# Altium PCB Agilent_3Ghz_option.PcbDoc
Units mm, origin at the board's own origin, x right, y up, seen from the top; angles counter-clockwise.
Board outline 100 x 42.01 mm, 2 copper layers (Top Layer, Bottom Layer), stack 1.671 mm thick; 60 components, 26 nets, 599 pads, 517 vias.
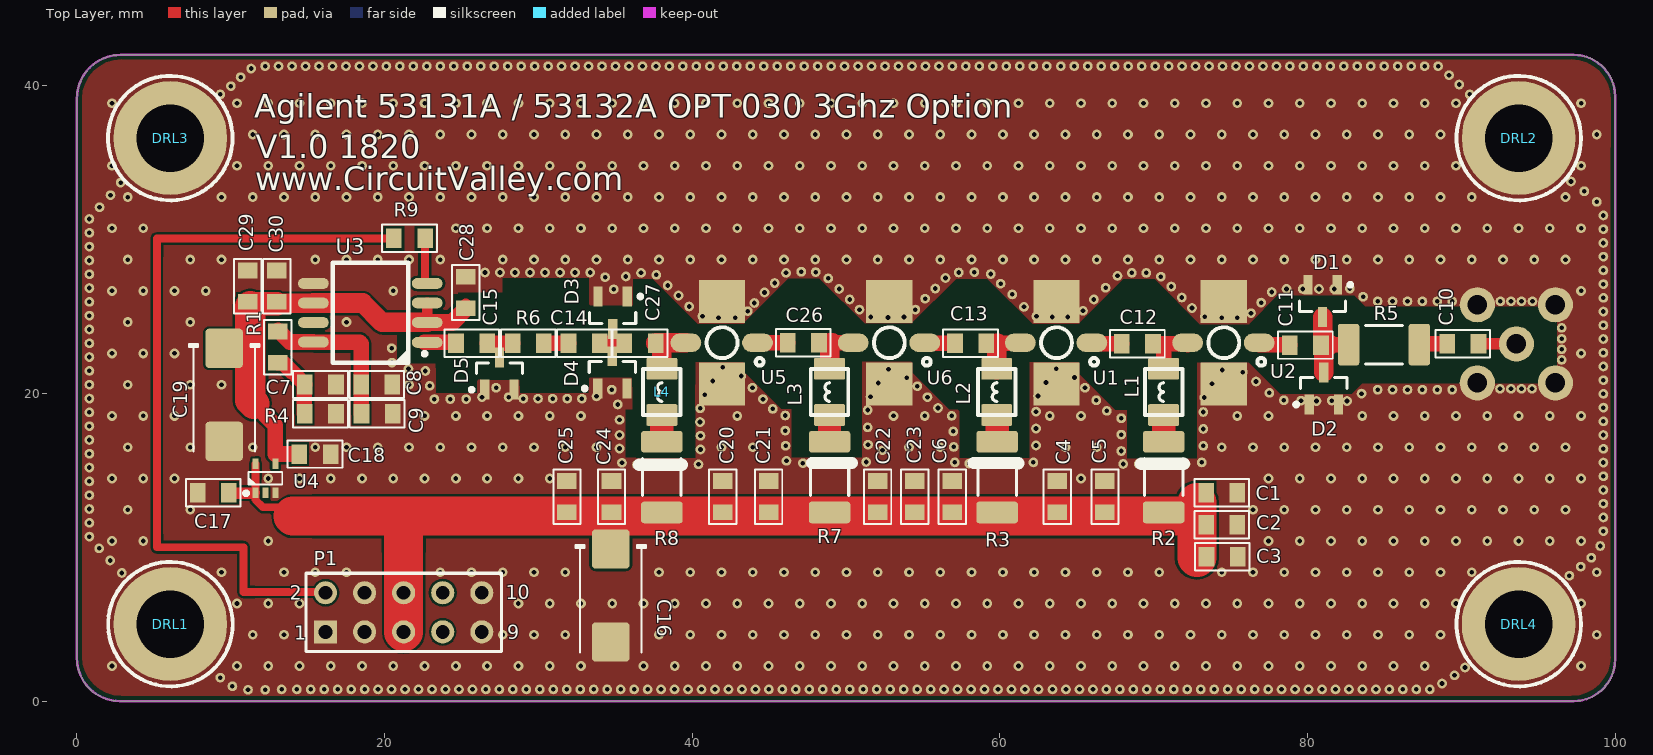
[diagram p0: Top Layer view]
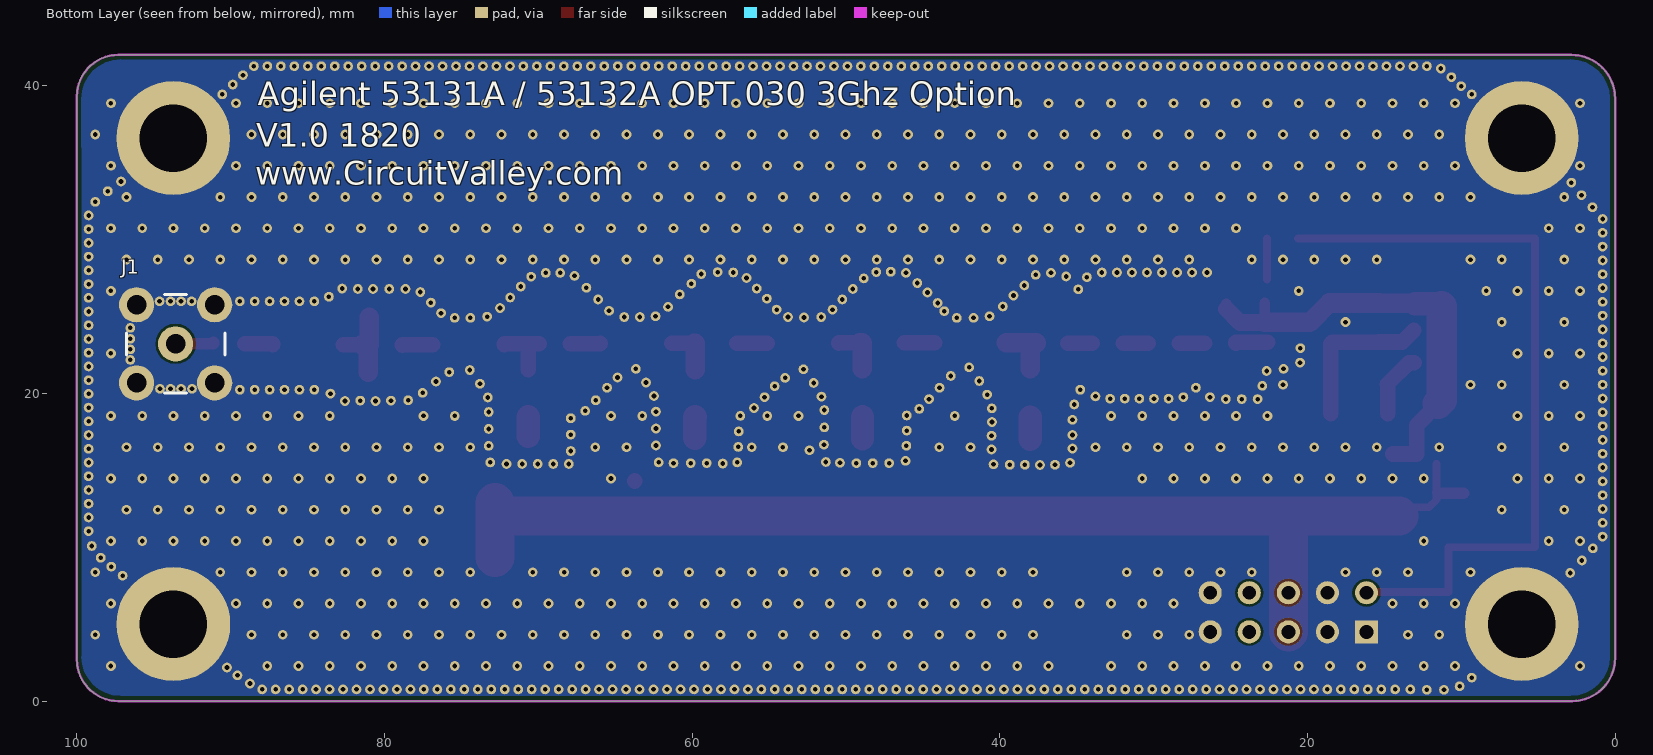
[diagram p1: Bottom Layer view, seen from below]

## Layer stack, top to bottom
Top Solder: solder mask 0.0102, Solder Resist, Dk 3.5
Top Layer: signal copper 0.0356
Dielectric 1: dielectric 1.6, FR-4, Dk 4.8
Bottom Layer: signal copper 0.0356
Bottom Solder: solder mask 0.0102, Solder Resist, Dk 3.5

## Board outline
0,2.795 ccw(c2.795,2.795) 2.795,0 97.301,0 ccw(c97.301,2.699) 100,2.699 100,39.32 ccw(c97.309,39.32) 97.309,42.012 2.835,42.012 ccw(c2.835,39.177) 0,39.177

## Design rules (kind name [scope] priority, off if disabled: settings)
Clearance [All] p1: gap=0.152
PolygonConnect [All] p1: connectstyle=Direct reliefconductorwidth=0.254 reliefentries=4 polygonreliefangle="90 Angle" airgapwidth=0.254
RoutingVias [All] p1: holewidth=0.711 width=1.27 viastyle="Through Hole" minholewidth=0.711 minwidth=1.27 maxholewidth=0.711 maxwidth=1.27
SolderMaskExpansion [All] p1: expansion=0.102
Width [All] p1: maxlimit=12.7 minlimit=0.152 preferedwidth=0.254
30 further rules are at their usual default settings.

## Components (designator, comment, footprint, x,y, rotation, side; value= is the part's Value field where it differs from the comment)
C1 "56p" 0805C-TBD 75.193,13.547 r180 top
C2 "1000p" 0805C-TBD 75.193,11.464 r180 top
C3 "1u" 0805C-TBD 75.218,9.381 r180 top
C4 "56p" 0805C-TBD 63.737,14.055 r270 top
C5 "1000p" 0805C-TBD 66.836,14.055 r270 top
C6 "1u" 0805C-TBD 56.905,14.055 r270 top
C7 "56p" 0805C-TBD 16.595,20.583 r180 top
C8 "56p" 0805C-TBD 20.252,20.583 r180 top
C9 "1000p" 0805C-TBD 20.278,18.678 r180 top
C10 "220p" 0805C-TBD 90.864,23.224 r180 top
C11 "56p" 0805C-TBD 80.628,23.148 r180 top
C12 "56p" 0805C-TBD 69.706,23.224 r180 top
C13 "220p" 0805C-TBD 58.86,23.275 r180 top
C14 "220p" 0805C-TBD 33.74,23.275 r180 top
C15 "56p" 0805C-TBD 26.425,23.275 r180 top
C16 "47uf 20V D" CAPMP7343X310N 34.705,6.867 r270 top
C17 "100n" 0805C-TBD 8.103,13.538 r0 top
C18 "1u" 0805C-TBD 16.239,16.061 r180 top
C19 "47uf 20V D" CAPMP7343X310N 9.576,19.914 r270 top
C20 "56p" 0805C-TBD 41.995,14.055 r270 top
C21 "1000p" 0805C-TBD 44.967,14.055 r270 top
C22 "1u" 0805C-TBD 52.053,14.055 r270 top
C23 "56p" 0805C-TBD 54.479,14.055 r270 top
C24 "1000p" 0805C-TBD 34.756,14.055 r270 top
C25 "1u" 0805C-TBD 31.86,14.055 r270 top
C26 "56p" 0805C-TBD 47.989,23.3 r180 top
C27 "220p" 0805C-TBD 37.372,23.275 r180 top
C28 "1000p" 0805C-TBD 25.273,25.806 r90 top
C29 "1000p" 0805C-TBD 11.1,26.213 r90 top
C30 "56p" 0805C-TBD 13.005,27.737 r270 top
D1 "HSMS-8202" SOT23_N 80.984,26.018 r270 top
D2 "HSMS-8202" SOT23_N 81.06,20.329 r90 top
D3 "HSMS-8202" SOT23_N 34.832,25.256 r270 top
D4 "HSMS-8202" SOT23_N 34.807,21.37 r90 top
D5 "HSMS-8202" SOT23_N 27.466,21.294 r90 top
DRL1 "Wurth Standoff" Wurth_PCB_STANDOFF_7740_6mm#1 6.082,5.004 r0 top locked
DRL2 "Wurth Standoff" Wurth_PCB_STANDOFF_7740_6mm#2 93.731,36.6 r0 top locked
DRL3 "Wurth Standoff" Wurth_PCB_STANDOFF_7740_6mm#2 6.071,36.6 r0 top locked
DRL4 "Wurth Standoff" Wurth_PCB_STANDOFF_7740_6mm#2 93.731,5.004 r0 top locked
J1 "CONMCX001" CON-MCX 93.582,23.224 r180 bottom
L1 "220n" NLV32T 70.646,20.1 r270 top
L2 "220n" NLV32T 59.8,20.1 r270 top
L3 "220n" NLV32T 48.929,20.1 r270 top
L4 "220n" NLV32T 38.032,20.1 r270 top
P1 "Header 5X2" HDR2X5 16.163,4.504 r0 top
R1 "10R" 0805R-TBD 13.056,22.25 r90 top
R2 "Thick Film" RESC5025N 70.646,14.563 r90 top
R3 "Thick Film" RESC5025N 59.826,14.563 r90 top
R4 "316" 0805R-TBD 16.595,18.678 r180 top
R5 "Thick Film" RESC5025N 84.972,23.173 r180 top
R6 "10R" 0805R-TBD 30.108,23.275 r180 top
R7 "Thick Film" RESC5025N 48.929,14.563 r90 top
R8 "Thick Film" RESC5025N 38.032,14.563 r90 top
R9 "316" 0805R-TBD 22.386,30.082 r180 top
U1 "SGA-5386Z" SOT-86 63.686,23.3 r180 top
U2 "SGA-5386Z" SOT-86 74.558,23.3 r180 top
U3 "MB510" FPT-08P-M01 19.075,25.248 r180 top
U4 "MIC5213-5.0YC5" SC70-5 12.251,14.487 r90 top
U5 "SGA-5386Z" SOT-86 41.944,23.3 r180 top
U6 "SGA-5386Z" SOT-86 52.815,23.3 r180 top

## Footprints (in the part's own frame and the unit in brackets; to place one, negate y for a bottom-side part, rotate by r counter-clockwise, add the part's x,y. Pads: shape width x height; smd on the part's side, far side on the other; paste and mask are expansions set on the pad)
0805C-TBD [mil] "CAPACITOR 0805"
  rect 40x50 smd: 1(-10,0) 2(70,0)
  silkscreen extent -40,-35 100,35, body extent -11,-25 70,25, height 26
0805R-TBD [mil] "RESISTOR 0805 VALUE TO BE DETERMINED"
  rect 40x50 smd: 1(-10,0) 2(70,0)
  silkscreen extent -40,-35 100,35, body extent -11,-25 70,25, height 27
CAPMP7343X310N [mm] "Molded body capacitor, Body 7.3x4.3mm, 2917, IPC Nominal settings"
  round 1 on Mech14: 0(0,0)
  rrect20% 2.55x2.45 smd: 1(-3.025,0) 2(3.025,0)
  silkscreen extent -3.3,-2.3 3.7,2.3, body extent -3.8,-1.97 3.8,1.98, height 3.1
CON-MCX [mil] "Connector, MCX Female, 5-Lead, Thru-Hole, Straight, Body 6x6mm"
  round 90 hole 50: 1(0,0) 2(-100,100) 3(100,100) 4(100,-100) 5(-100,-100)
  silkscreen extent -126,-126 126,126, body extent -126,-126 126,126, height 252
FPT-08P-M01 [mm] "FPT-08P-M01  MB510"
  oval 2x0.7 smd paste-2: 1(-3.7,1.93) 2(-3.7,0.635) 3(-3.7,-0.635) 4(-3.7,-1.905) 5(3.7,-1.905) 6(3.7,-0.635) 7(3.7,0.635) 8(3.7,1.905)
  silkscreen extent -3.66,-3.25 2.44,3.27, body extent -4.05,-2.73 4.05,2.73, height 1.76
HDR2X5 [mm] "Connector; Header; 5x2 Position"
  rect 1.5x1.5 hole 0.9: 1(0,0)
  round 1.5 hole 0.9: 2(0,2.54) 3(2.54,0) 4(2.54,2.54) 5(5.08,0) 6(5.08,2.54) 7(7.62,0) 8(7.62,2.54) 9(10.16,0) 10(10.16,2.54)
  silkscreen extent -1.27,-1.27 11.43,3.81
NLV32T [mm] "TDK NLV32T-1R0J-EF  (OCXO)"
  rrect10% 1.4x2 smd: 1(-1.5,0) 2(1.5,0)
  Top Layer pour cut-out: -0.635,0.991 -0.635,-1.067 0.635,-1.067 0.635,0.991
  silkscreen extent -1.5,-1.22 1.5,1.22, body extent -1.6,-1.25 1.6,1.25, height 2.29
RESC5025N [mm] "Chip Resistor, Body 5.0x2.5mm, 2010, IPC Medium Density"
  round 0.508 on Mech14: 0(0,0)
  rrect25% 1.4x2.7 smd: 1(-2.3,0) 2(2.3,0)
  silkscreen extent -1.2,-1.25 1.2,1.25, body extent -2.6,-1.35 2.6,1.35, height 0.69
SC70-5 [mm]
  round 0.254 on Mech14: 0(0,0)
  rrect25% 0.7x0.4 smd: 1(-0.94,0.65) 2(-0.94,0) 3(-0.94,-0.65) 4(0.94,-0.65) 5(0.94,0.65)
  silkscreen extent -1.1,-1.1 0.4,1.38, body extent -1.06,-1 1.04,1, height 0.95
SOT23_N [mm] "SOT23, 3-Leads, Body 2.9x1.3mm, Pitch 0.95mm, Lead Span 2.3mm, IPC Medium Density"
  rect 1.3x0.6 smd: 1(-1.05,0.95) 2(-1.05,-0.95) 3(1.05,0)
  silkscreen extent -1.17,-1.5 0.7,1.93, body extent -0.7,-1.5 0.7,1.5, height 1.1
SOT-86 [mm] "SGA-6386Z   RF MMIC"
  oval 2x1.2 smd: 1(-2.3,0) 3(2.35,0)
  rect 3x2.8 smd: 2(0,-2.675) 4(0,2.675)
  silkscreen extent -2.69,-1 1,1.5, body extent -2.54,-2.54 2.54,2.54, height 1.66
Wurth_PCB_STANDOFF_7740_6mm#1 [mm] "9774010360"
  round 7.4 hole 4.4: 0(-0.012,0)
  silkscreen extent -4.04,-4.05 4.05,4.05, body extent -3,-3 3,3, height 6.01
Wurth_PCB_STANDOFF_7740_6mm#2 [mm] "9774010360"
  round 7.4 hole 4.4: 0(0,0)
  silkscreen extent -4.04,-4.05 4.05,4.05, body extent -3,-3 3,3, height 6.01

## Part data
C1 C2 C3 C4 C5 C6 C7 C8 C9 C10 C11 C12 C13 C14 C15 C17 C18 C20 C21 C22 C23 C24 C25 C26 C27 C28 C29 C30: library part 0805C-TBD, "CAPACITOR 0805 CERAMIC VALUE TO BE DETERMINED"
C16 C19: library part CAPT_330u_2917_6V3, "Capacitor SMD Tant 330uF 20% 6V3 2917"
D1 D2 D3 D4 D5: library part BAT54S, "Schottky Barrier Double Diode"
DRL1 DRL2 DRL3 DRL4: library part PCB_Sandoff
J1: "MCX Female PCB Mount Connector, Thru-Hole"
L1 L2 L3 L4: library part inductor_smd
P1: "Header, 5-Pin, Dual row"
R1 R4 R6 R9: library part 0805R-TBD, "RESISTOR 0805 VALUE TO BE DETERMINED"
R2 R3 R5 R7 R8: library part RES_1R_2010_1%, "Resistor SMD chip 1 Ohm 1W 1% 2010"
U1 U2 U5 U6: library part MMIC_SOT86_AG302-86G_SGA-5386Z
U4: library part MIC5213

## Free pads (board coordinates)
  round 0.635 hole 0.305: 0(0.813,10.693) 0(0.813,11.591) 0(0.813,12.489) 0(0.813,13.387) 0(0.813,14.285) 0(0.813,15.183) 0(0.813,16.08) 0(0.813,16.978) 0(0.813,17.876) 0(0.813,18.774) 0(0.813,19.672) 0(0.813,20.57) 0(0.813,21.467) 0(0.813,22.365) 0(0.813,23.263) 0(0.813,24.161) 0(0.813,25.059) 0(0.813,25.957) 0(0.813,26.854) 0(0.813,27.752) 0(0.813,28.65) 0(0.813,29.548) 0(0.813,30.446) 0(0.813,31.344) 0(1.448,9.931) 0(1.473,32.106) 0(2.159,9.144) 0(2.184,32.893) 0(2.845,33.706) 0(2.921,8.331) 0(9.322,1.524) 0(9.322,39.446) 0(10.008,39.98) 0(10.109,0.965) 0(10.643,40.564) 0(11.125,0.737) 0(11.328,41.123) 0(12.236,41.275) 0(12.243,0.737) 0(13.112,41.275) 0(13.31,0.762) 0(13.988,41.275) 0(14.3,0.762) 0(14.864,41.275) 0(15.201,0.762) 0(15.74,41.275) 0(16.077,0.762) 0(16.616,41.275) 0(16.953,0.762) 0(17.492,41.275) 0(17.829,0.762) 0(18.369,41.275) 0(18.705,0.762) 0(19.245,41.275) 0(19.581,0.762) 0(20.121,41.275) 0(20.457,0.762) 0(20.464,22.945) 0(20.481,22.005) 0(20.997,41.275) 0(21.333,0.762) 0(21.556,21.599) 0(21.873,41.275) 0(22.209,0.762) 0(22.657,21.463) 0(22.749,41.275) 0(22.936,20.498) 0(23.086,0.762) 0(23.241,19.634) 0(23.625,41.275) 0(23.962,0.762) 0(24.274,19.634) 0(24.501,41.275) 0(24.838,0.762) 0(25.307,19.634) 0(25.377,41.275) 0(25.714,0.762) 0(26.253,41.275) 0(26.34,19.761) 0(26.526,27.864) 0(26.59,0.762) 0(27.129,41.275) 0(27.254,20.371) 0(27.466,0.762) 0(27.503,27.864) 0(28.005,41.275) 0(28.067,19.761) 0(28.342,0.762) 0(28.48,27.864) 0(28.882,41.275) 0(29.027,19.66) 0(29.218,0.762) 0(29.457,27.864) 0(29.758,41.275) 0(29.978,19.66) 0(30.094,0.762) 0(30.433,27.864) 0(30.634,41.275) 0(30.929,19.66) 0(30.97,0.762) 0(31.41,27.864) 0(31.51,41.275) 0(31.846,0.762) 0(31.88,19.66) 0(32.386,41.275) 0(32.387,27.864) 0(32.723,0.762) 0(32.831,19.66) 0(33.262,41.275) 0(33.364,27.864) 0(33.599,0.762) 0(33.782,19.812) 0(34.138,41.275) 0(34.341,27.559) 0(34.475,0.762) 0(34.773,20.244) 0(34.9,26.772) 0(35.014,41.275) 0(35.162,19.287) 0(35.281,16.417) 0(35.281,17.297) 0(35.281,18.288) 0(35.351,0.762) 0(35.433,15.494) 0(35.687,27.61) 0(35.89,41.275) 0(36.227,0.762) 0(36.413,15.367) 0(36.678,27.838) 0(36.766,41.275) 0(37.103,0.762) 0(37.394,15.35) 0(37.642,41.275) 0(37.668,27.711) 0(37.979,0.762) 0(38.374,15.367) 0(38.405,27.026) 0(38.518,41.275) 0(38.855,0.762) 0(39.116,26.365) 0(39.355,15.367) 0(39.395,41.275) 0(39.731,0.762) 0(39.802,25.654) 0(40.271,41.275) 0(40.411,15.392) 0(40.513,18.142) 0(40.522,19.033) 0(40.538,16.36) 0(40.538,17.251) 0(40.607,0.762) 0(40.665,25.019) 0(40.826,19.922) 0(41.147,41.275) 0(41.334,20.811) 0(41.483,0.762) 0(41.707,24.917) 0(41.995,21.7) 0(42.023,41.275) 0(42.359,0.762) 0(42.799,24.917) 0(42.899,41.275) 0(43.189,21.141) 0(43.236,0.762) 0(43.612,25.349) 0(43.775,41.275) 0(43.917,20.371) 0(44.044,25.883) 0(44.112,0.762) 0(44.602,19.634) 0(44.651,41.275) 0(44.704,26.568) 0(44.988,0.762) 0(45.237,18.999) 0(45.364,27.178) 0(45.527,41.275) 0(45.864,0.762) 0(46.05,17.585) 0(46.05,18.567) 0(46.076,16.603) 0(46.101,27.838) 0(46.126,15.621) 0(46.403,41.275) 0(46.74,0.762) 0(47.092,27.915) 0(47.193,15.469) 0(47.279,41.275) 0(47.616,0.762) 0(48.031,27.889) 0(48.155,41.275) 0(48.26,15.469) 0(48.492,0.762) 0(48.844,27.483) 0(49.031,41.275) 0(49.327,15.469) 0(49.368,0.762) 0(49.555,26.797) 0(49.908,41.275) 0(50.241,26.111) 0(50.244,0.762) 0(50.394,15.494) 0(50.784,41.275) 0(50.876,25.451) 0(51.12,0.762) 0(51.308,15.545) 0(51.41,17.797) 0(51.41,18.923) 0(51.435,16.671) 0(51.596,19.795) 0(51.613,24.968) 0(51.66,41.275) 0(51.996,0.762) 0(52.104,20.684) 0(52.536,41.275) 0(52.73,24.943) 0(52.764,21.573) 0(52.872,0.762) 0(53.412,41.275) 0(53.749,0.762) 0(53.772,24.968) 0(53.958,21.014) 0(54.288,41.275) 0(54.508,25.451) 0(54.625,0.762) 0(54.635,20.472) 0(55.143,26.162) 0(55.164,41.275) 0(55.296,19.761) 0(55.501,0.762) 0(55.804,26.822) 0(55.982,19.05) 0(56.04,41.275) 0(56.377,0.762) 0(56.464,27.508) 0(56.871,18.542) 0(56.916,41.275) 0(56.972,17.534) 0(57.006,16.527) 0(57.074,15.519) 0(57.253,0.762) 0(57.328,27.864) 0(57.792,41.275) 0(58.014,15.443) 0(58.129,0.762) 0(58.344,27.889) 0(58.668,41.275) 0(59.005,0.762) 0(59.055,15.469) 0(59.411,27.762) 0(59.544,41.275) 0(59.881,0.762) 0(60.054,27.136) 0(60.096,15.469) 0(60.421,41.275) 0(60.757,0.762) 0(60.808,26.441) 0(61.214,15.469) 0(61.297,41.275) 0(61.57,25.629) 0(61.633,0.762) 0(62.173,41.275) 0(62.179,15.519) 0(62.357,16.62) 0(62.357,17.721) 0(62.357,18.821) 0(62.382,25.019) 0(62.484,19.837) 0(62.509,0.762) 0(63.001,20.71) 0(63.049,41.275) 0(63.398,24.968) 0(63.424,0.762) 0(63.661,21.599) 0(63.963,41.275) 0(64.3,0.762) 0(64.414,24.968) 0(64.839,41.275) 0(64.855,21.04) 0(65.176,0.762) 0(65.405,25.375) 0(65.532,20.371) 0(65.715,41.275) 0(66.052,0.762) 0(66.116,26.111) 0(66.269,19.558) 0(66.591,41.275) 0(66.878,26.873) 0(66.928,0.762) 0(66.954,18.872) 0(67.468,41.275) 0(67.649,27.644) 0(67.804,0.762) 0(67.894,16.256) 0(67.894,17.323) 0(67.894,18.39) 0(68.021,15.418) 0(68.344,41.275) 0(68.58,27.838) 0(68.68,0.762) 0(69.032,15.418) 0(69.22,41.275) 0(69.52,27.838) 0(69.556,0.762) 0(70.043,15.418) 0(70.096,41.275) 0(70.432,0.762) 0(70.468,27.593) 0(70.972,41.275) 0(71.054,15.418) 0(71.145,26.949) 0(71.309,0.762) 0(71.831,26.238) 0(71.848,41.275) 0(72.065,15.418) 0(72.185,0.762) 0(72.492,25.552) 0(72.724,41.275) 0(73.061,0.762) 0(73.127,15.519) 0(73.228,16.595) 0(73.228,17.695) 0(73.228,18.796) 0(73.288,19.744) 0(73.33,24.994) 0(73.6,41.275) 0(73.796,20.633) 0(73.937,0.762) 0(74.422,24.917) 0(74.456,21.522) 0(74.476,41.275) 0(74.813,0.762) 0(75.352,41.275) 0(75.438,24.917) 0(75.689,0.762) 0(75.794,21.387) 0(76.228,41.275) 0(76.327,25.222) 0(76.565,0.762) 0(76.657,20.777) 0(76.987,25.908) 0(77.105,41.275) 0(77.441,0.762) 0(77.521,20.041) 0(77.673,26.594) 0(77.981,41.275) 0(78.317,0.762) 0(78.461,19.558) 0(78.638,26.797) 0(78.857,41.275) 0(79.193,0.762) 0(79.585,19.533) 0(79.693,26.797) 0(79.733,41.275) 0(80.069,0.762) 0(80.581,19.507) 0(80.609,41.275) 0(80.747,26.797) 0(80.945,0.762) 0(81.485,41.275) 0(81.578,19.533) 0(81.737,26.797) 0(81.822,0.762) 0(82.361,41.275) 0(82.575,19.507) 0(82.698,0.762) 0(82.753,26.822) 0(83.237,41.275) 0(83.515,19.99) 0(83.574,0.762) 0(83.617,26.289) 0(84.113,41.275) 0(84.45,0.762) 0(84.565,20.244) 0(84.565,25.993) 0(84.989,41.275) 0(85.326,0.762) 0(85.534,20.244) 0(85.534,25.993) 0(85.865,41.275) 0(86.202,0.762) 0(86.502,20.244) 0(86.502,25.993) 0(86.741,41.275) 0(87.078,0.762) 0(87.471,20.244) 0(87.471,25.993) 0(87.618,41.275) 0(87.954,0.762) 0(88.439,20.244) 0(88.439,25.993) 0(88.494,41.275) 0(88.748,1.143) 0(89.205,40.691) 0(89.408,20.244) 0(89.408,25.993) 0(89.56,1.676) 0(89.865,40.081) 0(90.246,2.184) 0(90.551,39.446) 0(92.515,20.303) 0(92.541,25.993) 0(93.227,20.303) 0(93.227,25.993) 0(93.912,20.303) 0(93.912,25.993) 0(94.598,20.303) 0(94.624,25.993) 0(96.529,22.183) 0(96.529,22.869) 0(96.529,23.554) 0(96.529,24.266) 0(97.028,8.153) 0(97.13,33.782) 0(97.765,8.738) 0(97.993,33.147) 0(98.45,9.322) 0(98.806,32.461) 0(99.035,10.084) 0(99.238,11.049) 0(99.238,11.941) 0(99.238,12.834) 0(99.238,13.726) 0(99.238,14.618) 0(99.238,15.511) 0(99.238,16.403) 0(99.238,17.295) 0(99.238,18.187) 0(99.238,19.08) 0(99.238,19.972) 0(99.238,20.864) 0(99.238,21.757) 0(99.238,22.649) 0(99.238,23.541) 0(99.238,24.434) 0(99.238,25.326) 0(99.238,26.218) 0(99.238,27.111) 0(99.238,28.003) 0(99.238,28.895) 0(99.238,29.788) 0(99.238,30.68) 0(99.238,31.572)

## Via types
v1: diameter 0.635, hole 0.305, Top Layer to Bottom Layer, tented both sides, 517 vias

## Nets (pads, with @x,y where several pads share a name; then routed paths per layer and width w, separated by ;. In a path a pad name is that pad's centre, name@x,y a point inside that pad or via, vN(x,y) a via of type N, cw(c..) or ccw(c..) an arc to the next point about the centre after c; other vN are vias at no path point)
5V: C18.2 C19.1 C28.1 C29.1 C30.2 U3.2 U3.3 U3.6 U4.4 | length 28.7
  Top Layer w0.7: U3.2 22.775,24.621 U3.3
  Top Layer w0.762: C28.1@25.273,25.485 C28.1@25.273,25.806
  Top Layer w1.016: 11.506,19.329 12.901,17.934 12.901,16.061 C18.2
  Top Layer w1.1: U3.2 24.401,24.613 C28.1@25.273,25.485
  Top Layer w1.27: C30.2@12.683,25.866 U3.6@15.375,25.866 ; U3.6 18.585,25.883 19.846,24.621 U3.2@22.775,24.621
  Top Layer w1.5: C29.1@11.268,25.663 11.437,25.832 C30.2@13.005,25.832
  Top Layer w2: C29.1@11.268,25.663 11.268,19.567 11.506,19.329
12V: C1.2 C2.2 C3.2 C4.2 C5.2 C6.2 C16.1 C17.2 C20.2 C21.2 C22.2 C23.2 C24.2 C25.2 P1.5 P1.6 R2.1 R3.1 R7.1 R8.1 U4.1 U4.5 | length 76.4
  Top Layer w0.508: U4.5 U4.1 11.601,13.101 12.096,12.607 13.928,12.607
  Top Layer w0.762: C17.2@9.838,13.521 11.493,13.521 U4.1@11.518,13.547
  Top Layer w2.54: 14.055,12.023 19.567,12.023 67.039,12.023 72.805,12.023 ; 21.091,11.997 21.243,11.845 P1.6 P1.5 ; 72.805,9.33 72.805,12.023 ; 72.805,12.912 72.805,12.023
GND: C1.1 C2.1 C3.1 C4.1 C5.1 C6.1 C7.1 C8.1 C9.1 C16.2 C17.1 C18.1 C19.2 C20.1 C21.1 C22.1 C23.1 C24.1 C25.1 C28.2 C29.2 C30.1 D1.1 D1.2 D2.1 D2.2 D3.1 D3.2 D4.1 D4.2 D5.1 D5.2 DRL1.0 DRL2.0 DRL3.0 DRL4.0 J1.2 J1.3 J1.4 J1.5 P1.1 P1.3 P1.4 P1.9 P1.10 pad.0 R4.1 U1.2 U1.4 U2.2 U2.4 U3.5 U4.3 U5.2 U5.4 U6.2 U6.4 | length 0
  Top Layer w1.016: C4.1 C4.1@63.737,14.334
  other v1: 2.286,2.286 10.414,2.286 12.446,2.286 14.478,2.286 16.51,2.286 18.542,2.286 20.574,2.286 22.606,2.286 24.638,2.286 26.67,2.286 28.702,2.286 30.734,2.286 32.766,2.286 36.83,2.286 38.862,2.286 40.894,2.286 42.926,2.286 44.958,2.286 46.99,2.286 49.022,2.286 51.054,2.286 53.086,2.286 55.118,2.286 57.15,2.286 59.182,2.286 61.214,2.286 63.246,2.286 65.278,2.286 67.31,2.286 69.342,2.286 71.374,2.286 73.406,2.286 75.438,2.286 77.47,2.286 79.502,2.286 81.534,2.286 83.566,2.286 85.598,2.286 87.63,2.286 97.79,2.286 11.43,4.318 13.462,4.318 27.686,4.318 29.718,4.318 31.75,4.318 37.846,4.318 39.878,4.318 41.91,4.318 43.942,4.318 45.974,4.318 48.006,4.318 50.038,4.318 52.07,4.318 54.102,4.318 56.134,4.318 58.166,4.318 60.198,4.318 62.23,4.318 64.262,4.318 66.294,4.318 68.326,4.318 70.358,4.318 72.39,4.318 74.422,4.318 76.454,4.318 78.486,4.318 80.518,4.318 82.55,4.318 84.582,4.318 86.614,4.318 88.646,4.318 98.806,4.318 10.414,6.35 12.446,6.35 14.478,6.35 28.702,6.35 30.734,6.35 32.766,6.35 34.798,6.35 36.83,6.35 38.862,6.35 40.894,6.35 42.926,6.35 44.958,6.35 46.99,6.35 49.022,6.35 51.054,6.35 53.086,6.35 55.118,6.35 57.15,6.35 59.182,6.35 61.214,6.35 63.246,6.35 65.278,6.35 67.31,6.35 69.342,6.35 71.374,6.35 73.406,6.35 75.438,6.35 77.47,6.35 79.502,6.35 81.534,6.35 83.566,6.35 85.598,6.35 87.63,6.35 89.662,6.35 97.79,6.35 9.398,8.382 13.462,8.382 15.494,8.382 17.526,8.382 23.622,8.382 25.654,8.382 27.686,8.382 29.718,8.382 31.75,8.382 37.846,8.382 39.878,8.382 41.91,8.382 43.942,8.382 45.974,8.382 48.006,8.382 50.038,8.382 52.07,8.382 54.102,8.382 56.134,8.382 58.166,8.382 60.198,8.382 62.23,8.382 64.262,8.382 66.294,8.382 68.326,8.382 70.358,8.382 74.422,8.382 76.454,8.382 78.486,8.382 80.518,8.382 82.55,8.382 84.582,8.382 86.614,8.382 88.646,8.382 90.678,8.382 98.806,8.382 2.286,10.414 4.318,10.414 12.446,10.414 77.47,10.414 79.502,10.414 81.534,10.414 83.566,10.414 85.598,10.414 87.63,10.414 89.662,10.414 91.694,10.414 93.726,10.414 95.758,10.414 97.79,10.414 3.302,12.446 7.366,12.446 76.454,12.446 78.486,12.446 80.518,12.446 82.55,12.446 84.582,12.446 86.614,12.446 88.646,12.446 90.678,12.446 92.71,12.446 94.742,12.446 96.774,12.446 2.286,14.478 4.318,14.478 6.35,14.478 12.446,14.478 14.478,14.478 16.51,14.478 18.542,14.478 20.574,14.478 22.606,14.478 24.638,14.478 26.67,14.478 28.702,14.478 30.734,14.478 65.278,14.478 77.47,14.478 79.502,14.478 81.534,14.478 83.566,14.478 85.598,14.478 87.63,14.478 89.662,14.478 91.694,14.478 93.726,14.478 95.758,14.478 97.79,14.478 52.375,16.307 3.302,16.51 7.366,16.51 11.43,16.51 15.494,16.51 17.526,16.51 19.558,16.51 21.59,16.51 23.622,16.51 25.654,16.51 27.686,16.51 29.718,16.51 31.75,16.51 33.782,16.51 41.91,16.51 43.942,16.51 54.102,16.51 56.134,16.51 64.262,16.51 66.294,16.51 74.422,16.51 76.454,16.51 78.486,16.51 80.518,16.51 82.55,16.51 84.582,16.51 86.614,16.51 88.646,16.51 90.678,16.51 92.71,16.51 94.742,16.51 96.774,16.51 2.286,18.542 4.318,18.542 6.35,18.542 22.606,18.542 24.638,18.542 26.67,18.542 28.702,18.542 30.734,18.542 32.766,18.542 42.926,18.542 53.086,18.542 55.118,18.542 63.246,18.542 65.278,18.542 75.438,18.542 77.47,18.542 83.566,18.542 85.598,18.542 87.63,18.542 89.662,18.542 91.694,18.542 93.726,18.542 95.758,18.542 97.79,18.542 3.302,20.574 7.366,20.574 9.398,20.574 21.59,20.574 2.286,22.606 4.318,22.606 6.35,22.606 97.79,22.606 3.302,24.638 7.366,24.638 17.526,24.638 2.286,26.67 4.318,26.67 6.35,26.67 8.382,26.67 20.574,26.67 97.79,26.67 3.302,28.702 7.366,28.702 9.398,28.702 15.494,28.702 17.526,28.702 19.558,28.702 21.59,28.702 23.622,28.702 27.686,28.702 29.718,28.702 31.75,28.702 33.782,28.702 35.814,28.702 37.846,28.702 39.878,28.702 41.91,28.702 43.942,28.702 45.974,28.702 48.006,28.702 50.038,28.702 52.07,28.702 54.102,28.702 56.134,28.702 58.166,28.702 60.198,28.702 62.23,28.702 64.262,28.702 66.294,28.702 68.326,28.702 70.358,28.702 72.39,28.702 74.422,28.702 76.454,28.702 78.486,28.702 80.518,28.702 82.55,28.702 84.582,28.702 86.614,28.702 88.646,28.702 90.678,28.702 92.71,28.702 94.742,28.702 96.774,28.702 2.286,30.734 4.318,30.734 24.638,30.734 26.67,30.734 28.702,30.734 30.734,30.734 32.766,30.734 34.798,30.734 36.83,30.734 38.862,30.734 40.894,30.734 42.926,30.734 44.958,30.734 46.99,30.734 49.022,30.734 51.054,30.734 53.086,30.734 55.118,30.734 57.15,30.734 59.182,30.734 61.214,30.734 63.246,30.734 65.278,30.734 67.31,30.734 69.342,30.734 71.374,30.734 73.406,30.734 75.438,30.734 77.47,30.734 79.502,30.734 81.534,30.734 83.566,30.734 85.598,30.734 87.63,30.734 89.662,30.734 91.694,30.734 93.726,30.734 95.758,30.734 97.79,30.734 3.302,32.766 9.398,32.766 11.43,32.766 13.462,32.766 15.494,32.766 17.526,32.766 19.558,32.766 21.59,32.766 23.622,32.766 25.654,32.766 27.686,32.766 29.718,32.766 31.75,32.766 33.782,32.766 35.814,32.766 37.846,32.766 39.878,32.766 41.91,32.766 43.942,32.766 45.974,32.766 48.006,32.766 50.038,32.766 52.07,32.766 54.102,32.766 56.134,32.766 58.166,32.766 60.198,32.766 62.23,32.766 64.262,32.766 66.294,32.766 68.326,32.766 70.358,32.766 72.39,32.766 74.422,32.766 76.454,32.766 78.486,32.766 80.518,32.766 82.55,32.766 84.582,32.766 86.614,32.766 88.646,32.766 90.678,32.766 96.774,32.766 2.286,34.798 10.414,34.798 12.446,34.798 14.478,34.798 16.51,34.798 18.542,34.798 20.574,34.798 22.606,34.798 24.638,34.798 26.67,34.798 28.702,34.798 30.734,34.798 32.766,34.798 34.798,34.798 36.83,34.798 38.862,34.798 40.894,34.798 42.926,34.798 44.958,34.798 46.99,34.798 49.022,34.798 51.054,34.798 53.086,34.798 55.118,34.798 57.15,34.798 59.182,34.798 61.214,34.798 63.246,34.798 65.278,34.798 67.31,34.798 69.342,34.798 71.374,34.798 73.406,34.798 75.438,34.798 77.47,34.798 79.502,34.798 81.534,34.798 83.566,34.798 85.598,34.798 87.63,34.798 89.662,34.798 97.79,34.798 11.43,36.83 13.462,36.83 15.494,36.83 17.526,36.83 19.558,36.83 21.59,36.83 23.622,36.83 25.654,36.83 27.686,36.83 29.718,36.83 31.75,36.83 33.782,36.83 35.814,36.83 37.846,36.83 39.878,36.83 41.91,36.83 43.942,36.83 45.974,36.83 48.006,36.83 50.038,36.83 52.07,36.83 54.102,36.83 56.134,36.83 58.166,36.83 60.198,36.83 62.23,36.83 64.262,36.83 66.294,36.83 68.326,36.83 70.358,36.83 72.39,36.83 74.422,36.83 76.454,36.83 78.486,36.83 80.518,36.83 82.55,36.83 84.582,36.83 86.614,36.83 88.646,36.83 98.806,36.83 2.286,38.862 10.414,38.862 12.446,38.862 14.478,38.862 16.51,38.862 18.542,38.862 20.574,38.862 22.606,38.862 24.638,38.862 26.67,38.862 28.702,38.862 30.734,38.862 32.766,38.862 34.798,38.862 36.83,38.862 38.862,38.862 40.894,38.862 42.926,38.862 44.958,38.862 46.99,38.862 49.022,38.862 51.054,38.862 53.086,38.862 55.118,38.862 57.15,38.862 59.182,38.862 61.214,38.862 63.246,38.862 65.278,38.862 67.31,38.862 69.342,38.862 71.374,38.862 73.406,38.862 75.438,38.862 77.47,38.862 79.502,38.862 81.534,38.862 83.566,38.862 85.598,38.862 87.63,38.862 89.662,38.862 97.79,38.862
NetC7_2: C7.2 R1.1 R4.2 | length 4.3
  Top Layer w1.016: R1.1 13.403,21.996 C7.2@14.791,20.608 ; R4.2@14.791,18.678 C7.2@14.791,20.608 ; C7.2 C7.2@14.791,20.608
NetC8_2: C8.2 C9.2 R1.2 U3.8 | length 10.3
  Top Layer w1.016: R1.2@13.081,24.105 13.843,23.343 U3.8 15.392,23.326 18.386,23.326 18.474,23.237 C8.2 C9.2@18.474,18.678
NetC10_1: C10.1 J1.1 | length 2.6
  Top Layer w0.762: C10.1@91.118,23.326 C10.1 J1.1
NetC10_2: C10.2 R5.1 | length 1.9
  Top Layer w1.016: R5.1 87.272,23.224 C10.2
NetC11_1: C11.1 D1.3 D2.3 R5.2 | length 5.3
  Top Layer w1.016: 81.466,23.173 R5.2
  Top Layer w1.27: D1.3 80.984,23.173 81.466,23.173 ; D2.3 C11.1@81.06,23.148
NetC11_2: C11.2 U2.1 | length 2
  Top Layer w1.016: U2.1@76.858,23.173 78.85,23.173 C11.2
NetC12_1: C12.1 L1.1 U2.3 | length 4
  Top Layer w1.016: C12.1 70.646,23.224 ; L1.1@70.646,21.549 70.646,23.224 ; U2.3@72.208,23.173 72.208,23.224 70.646,23.224
NetC12_2: C12.2 U1.1 | length 2
  Top Layer w1.016: U1.1@65.986,23.275 65.986,23.224 C12.2
NetC13_1: C13.1 L2.1 U1.3 | length 3.3
  Top Layer w1.016: 59.876,23.275 U1.3@61.336,23.275
  Top Layer w1.27: L2.1@59.8,21.549 59.8,23.275 59.876,23.275
NetC13_2: C13.2 U6.1 | length 2
  Top Layer w1.016: U6.1@55.115,23.275 C13.2
NetC14_1: C14.1 C27.2 D3.3 D4.3 | length 1.6
  Top Layer w1.016: C14.1 C27.2
NetC14_2: C14.2 R6.1 | length 1.6
  Top Layer w1.016: R6.1 C14.2
NetC15_1: C15.1 D5.3 R6.2 | length 1.7
  Top Layer w1.016: C15.1 R6.2
NetC15_2: C15.2 U3.1 | length 2.1
  Top Layer w1.016: U3.1@22.595,23.326 24.647,23.326 C15.2
NetC26_1: C26.1 L3.1 U6.3 | length 3.3
  Top Layer w1.016: 49.107,23.3 U6.3 U6.3@50.465,23.275
  Top Layer w1.27: L3.1 48.929,23.3 49.107,23.3
NetC26_2: C26.2 U5.1 | length 2
  Top Layer w1.016: U5.1 C26.2
NetC27_1: C27.1 L4.1 U5.3 | length 3.7
  Top Layer w1.27: C27.1 37.626,23.3 C27.1@38.032,23.3 ; L4.1 C27.1@38.032,23.3 ; U5.3 C27.1@38.032,23.3
NetL1_2: L1.2 R2.2 | length 1.3
  Top Layer w1.524: R2.2@70.646,17.204 L1.2@70.646,18.5
NetL2_2: L2.2 R3.2 | length 1.4
  Top Layer w1.524: L2.2@59.8,18.5 59.826,18.5 R3.2@59.826,17.077
NetL3_2: L3.2 R7.2 | length 1.4
  Top Layer w1.524: R7.2@48.929,17.052 L3.2@48.929,18.5
NetL4_2: L4.2 R8.2 | length 1.4
  Top Layer w1.524: R8.2@38.032,17.027 L4.2@38.032,18.449
NetR9_1: R9.1 U3.4 | length 2.7
  Top Layer w0.508: U3.4@22.621,27.415 22.621,30.063 R9.1
SIG: P1.2 R9.2 | length 49.4
  Top Layer w0.508: P1.2@16.188,7.07 P1.2 16.112,7.095 10.829,7.095 10.829,10.008 5.207,10.008 5.207,30.082 R9.2
pads on no net: C16.0 C19.0 P1.7 P1.8 R2.0 R3.0 R5.0 R7.0 R8.0 U3.7 U4.0 U4.2

## Polygon pours and split planes (outlines as drawn)
GND on Top Layer "Bottom Layer-GND" (solid, remove dead copper, pour order 7): 35.086,13.471 36.331,13.471 36.331,20.151 36.331,20.481 26.374,20.481 26.374,21.624 20.887,21.624 20.887,21.98 17.535,21.98 14.004,21.98 14.004,13.471 17.535,13.471
GND on Top Layer "Bottom Layer-GND" (solid, remove dead copper, pour order 8): 20.93,25.806 20.93,28.854 20.117,28.854 4.674,28.854 4.674,23.038 4.674,10.897 8.306,10.897 11.608,10.897 11.608,4.14 11.608,3.785 32.766,3.785 32.766,9.652 15.265,9.652 15.265,14.376 11.557,14.376 11.557,25.806
GND on Top Layer "Bottom Layer-GND" (solid, remove dead copper, pour order 6): 16.434,0.356 97.155,0.356 ccw(c97.155,2.896) 99.695,2.896 99.695,32.817 99.695,39.167 ccw(c97.155,39.167) 97.155,41.707 17.45,41.707 2.896,41.707 ccw(c2.896,39.167) 0.356,39.167 0.356,17.094 0.356,2.896 ccw(c2.896,2.896) 2.896,0.356 16.434,0.356
GND on Bottom Layer "Bottom Layer-GND" (solid, remove dead copper, pour order 5): 16.434,0.356 97.155,0.356 ccw(c97.155,2.896) 99.695,2.896 99.695,32.817 99.695,39.167 ccw(c97.155,39.167) 97.155,41.707 17.45,41.707 2.896,41.707 ccw(c2.896,39.167) 0.356,39.167 0.356,17.094 0.356,2.896 ccw(c2.896,2.896) 2.896,0.356 16.434,0.356

## Keep-outs
Keep-Out Layer:
  lines w0.152: 0,2.795 ccw(c2.795,2.795) 2.795,0 29.972,0 97.301,0 ccw(c97.301,2.699) 100,2.699 100,39.32 ccw(c97.309,39.32) 97.309,42.012 2.835,42.012 ccw(c2.835,39.177) 0,39.177 0,2.795

## Other copper
Top Layer:
  pour cut-out: 70.062,27.415 73.008,24.469 76.234,24.469 76.234,22.03 72.805,22.005 72.805,18.957 67.496,18.957 65.21,21.243 65.21,24.596 68.03,27.415
  pour cut-out: 59.191,27.441 62.137,24.494 65.363,24.494 65.363,22.056 61.908,22.056 61.908,18.982 56.701,18.982 54.339,21.345 54.339,24.621 57.159,27.441
  pour cut-out: 48.269,27.466 51.215,24.52 54.441,24.52 54.441,22.081 51.012,22.081 51.012,19.008 45.779,19.008 43.417,21.37 43.417,24.647 46.237,27.466
  pour cut-out: 37.423,27.441 40.369,24.494 43.595,24.494 43.595,22.056 40.205,22.056 40.18,18.982 36.096,18.982 36.096,21.065 35.391,21.065 35.391,25.713 36.178,25.713 36.178,27.441
  pour cut-out: 35.442,25.713 33.283,25.713 33.283,27.491 27.695,27.491 27.695,26.552 24.799,26.552 24.799,24.494 20.811,24.494 20.811,21.954 23.326,21.954 23.326,20.024 26.018,20.024 26.018,20.887 28.787,20.887 28.787,20.024 33.283,20.024 33.283,21.065 35.442,21.065
  pour cut-out: 83.041,26.348 83.752,25.637 88.553,25.637 96.198,25.637 96.198,20.659 88.553,20.659 83.575,20.659 82.889,19.973 78.215,19.973 76.234,21.954 76.234,24.545 78.037,26.348
  pour cut-out: 46.465,19.008 46.465,15.858 51.012,15.858 51.012,19.008
  pour cut-out: 57.387,18.957 57.387,15.807 61.908,15.807 61.908,18.957
  pour cut-out: 35.645,18.982 35.645,15.833 40.191,15.833 40.191,18.982
  pour cut-out: 68.284,18.932 68.284,15.782 72.805,15.782 72.805,18.932

## Silkscreen, mask and mechanical layers (free items; w line width, h text height)
Top Overlay:
  lines w0.8: 36.559,15.376 39.328,15.376 ; 47.803,15.477 50.394,15.477 ; 58.302,15.477 61.214,15.469 ; 69.198,15.426 71.967,15.426
  text "Agilent 53131A / 53132A OPT 030 3Ghz Option" at 11.532,37.922 h1.52
  text "V1.0 1820" at 11.633,35.306 h1.52
  text "www.CircuitValley.com" at 11.608,33.198 h1.52
Bottom Overlay:
  text "Agilent 53131A / 53132A OPT 030 3Ghz Option" at 88.24,38.735 h1.52
  text "V1.0 1820" at 88.341,36.043 h1.52
  text "www.CircuitValley.com" at 88.417,33.579 h1.52

## Text inside footprints (layer, text, board x,y; h text height)
P1: Top Overlay "1" at 14.131,3.996 h0.9; Top Overlay "2" at 13.852,6.587 h0.9; Top Overlay "9" at 27.974,4.022 h0.9; Top Overlay "10" at 27.872,6.638 h0.9